# EAGLE board nervous_system (EAGLE 8.4.1), part 1 of 2
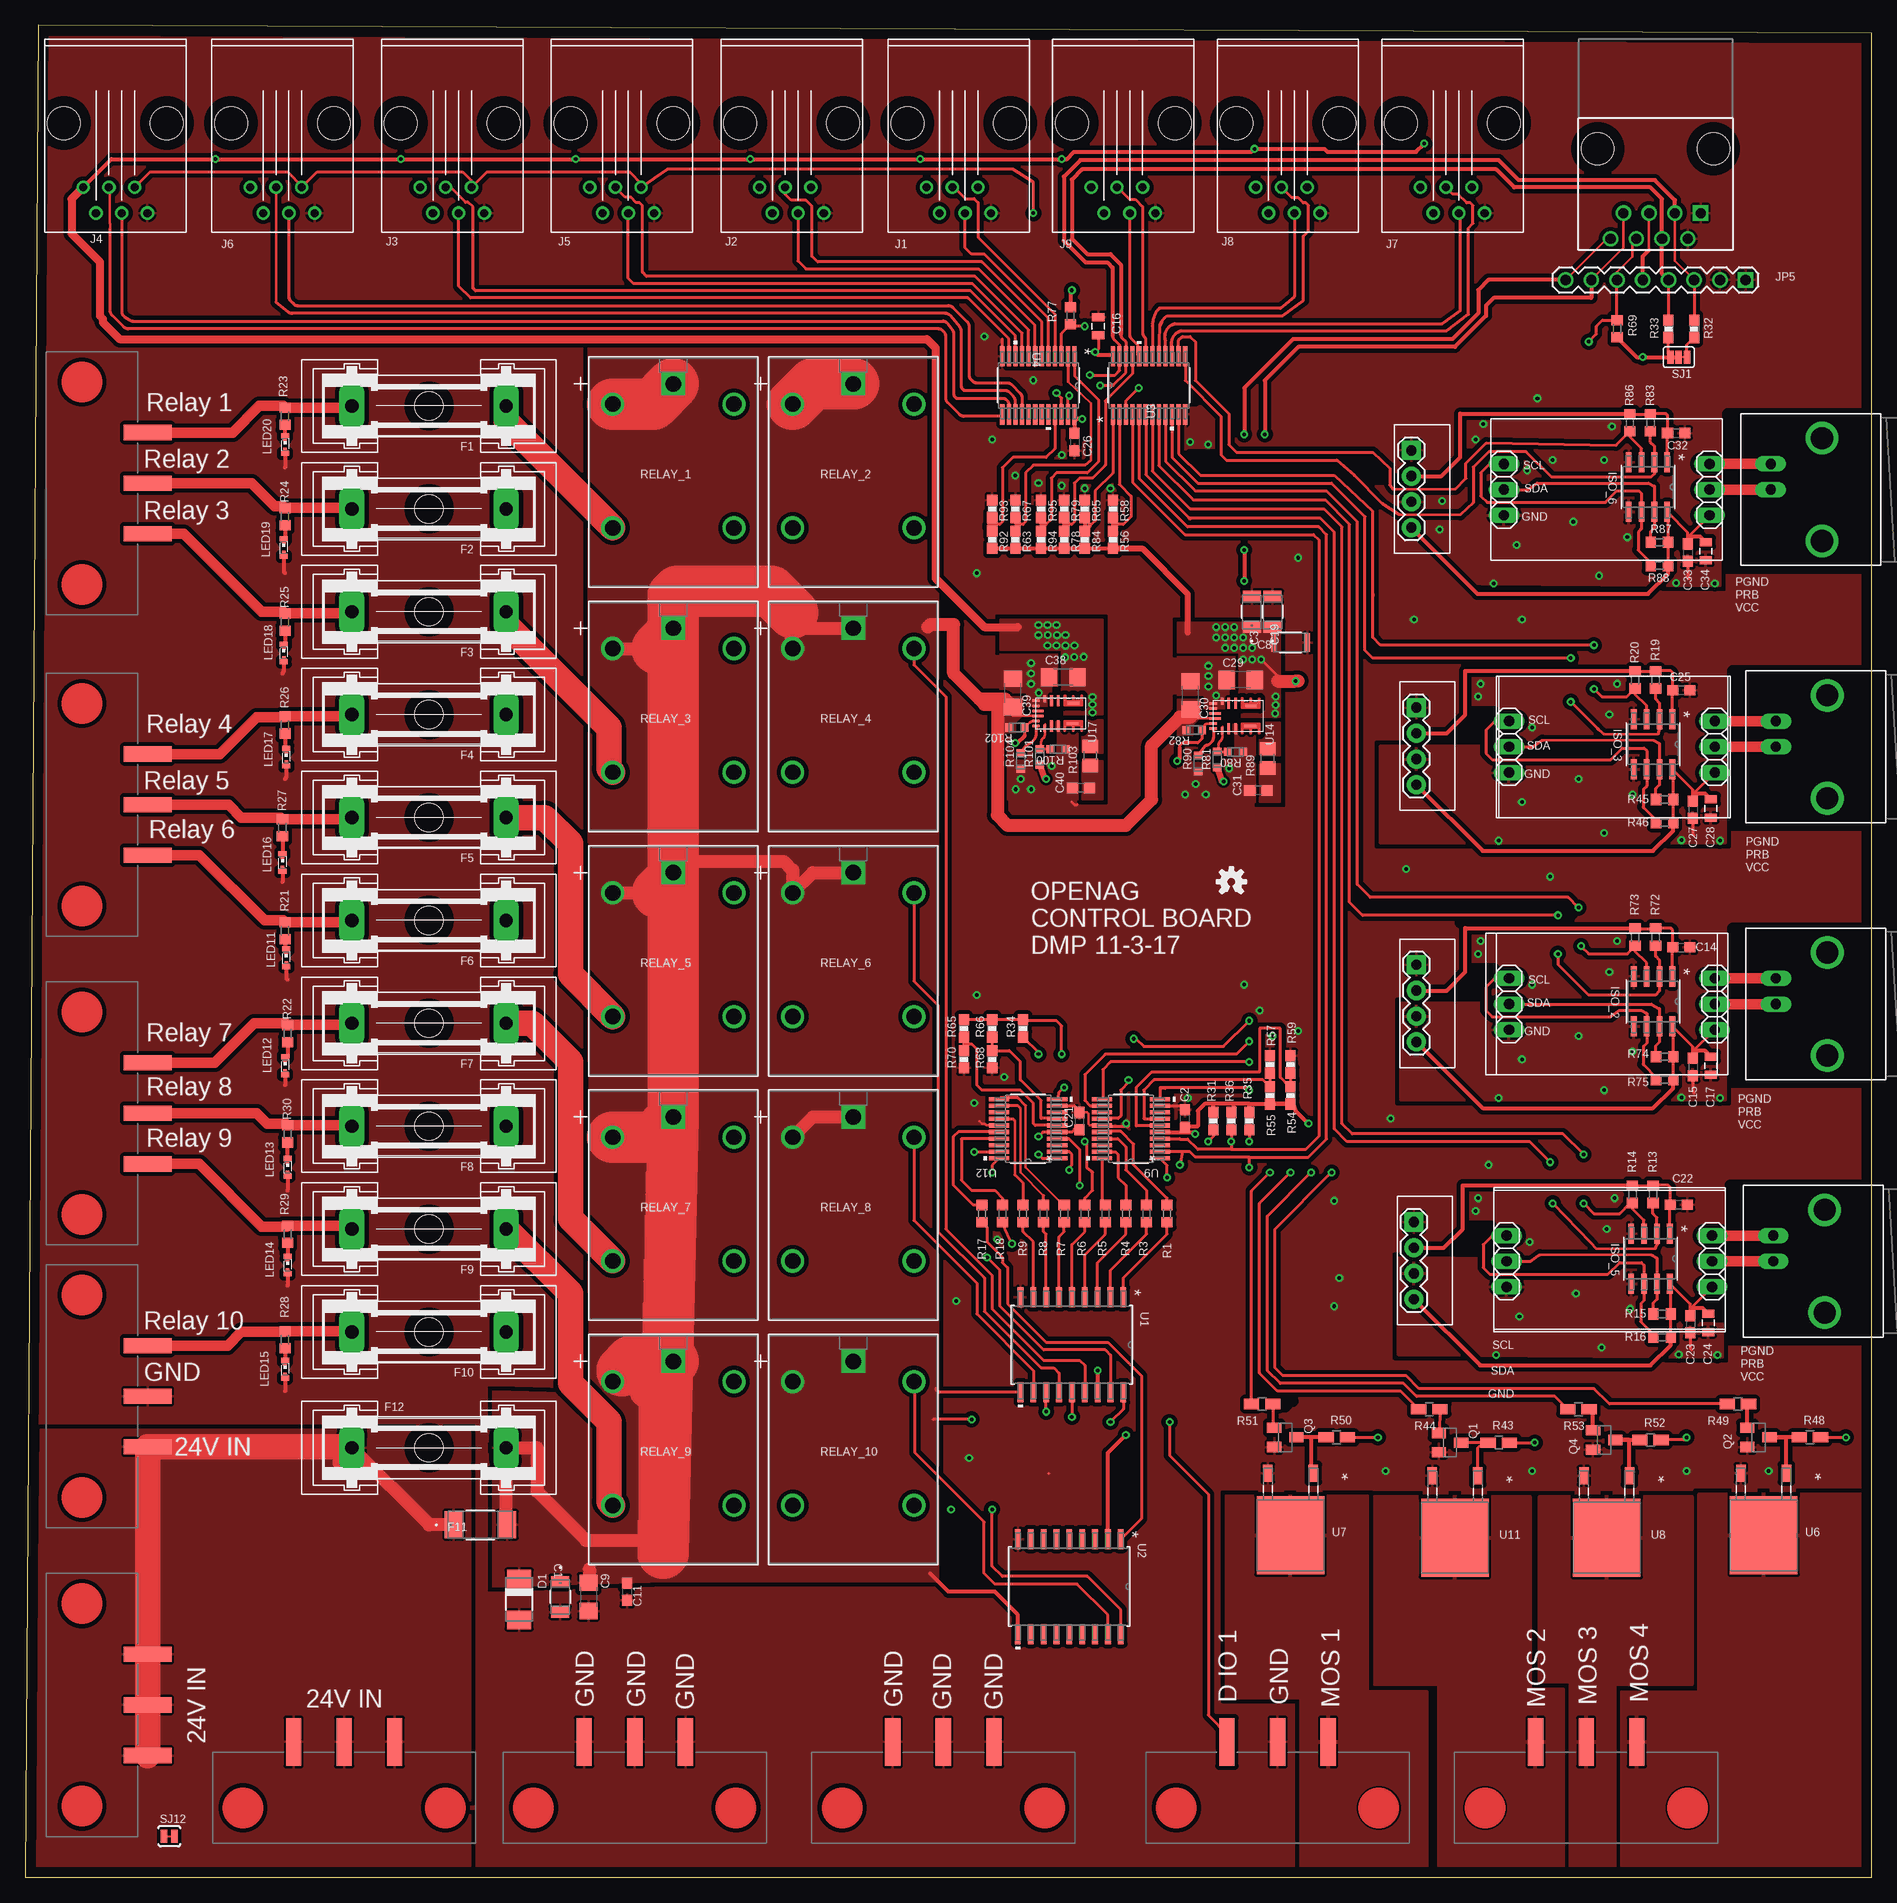
[diagram p0: board, top side]
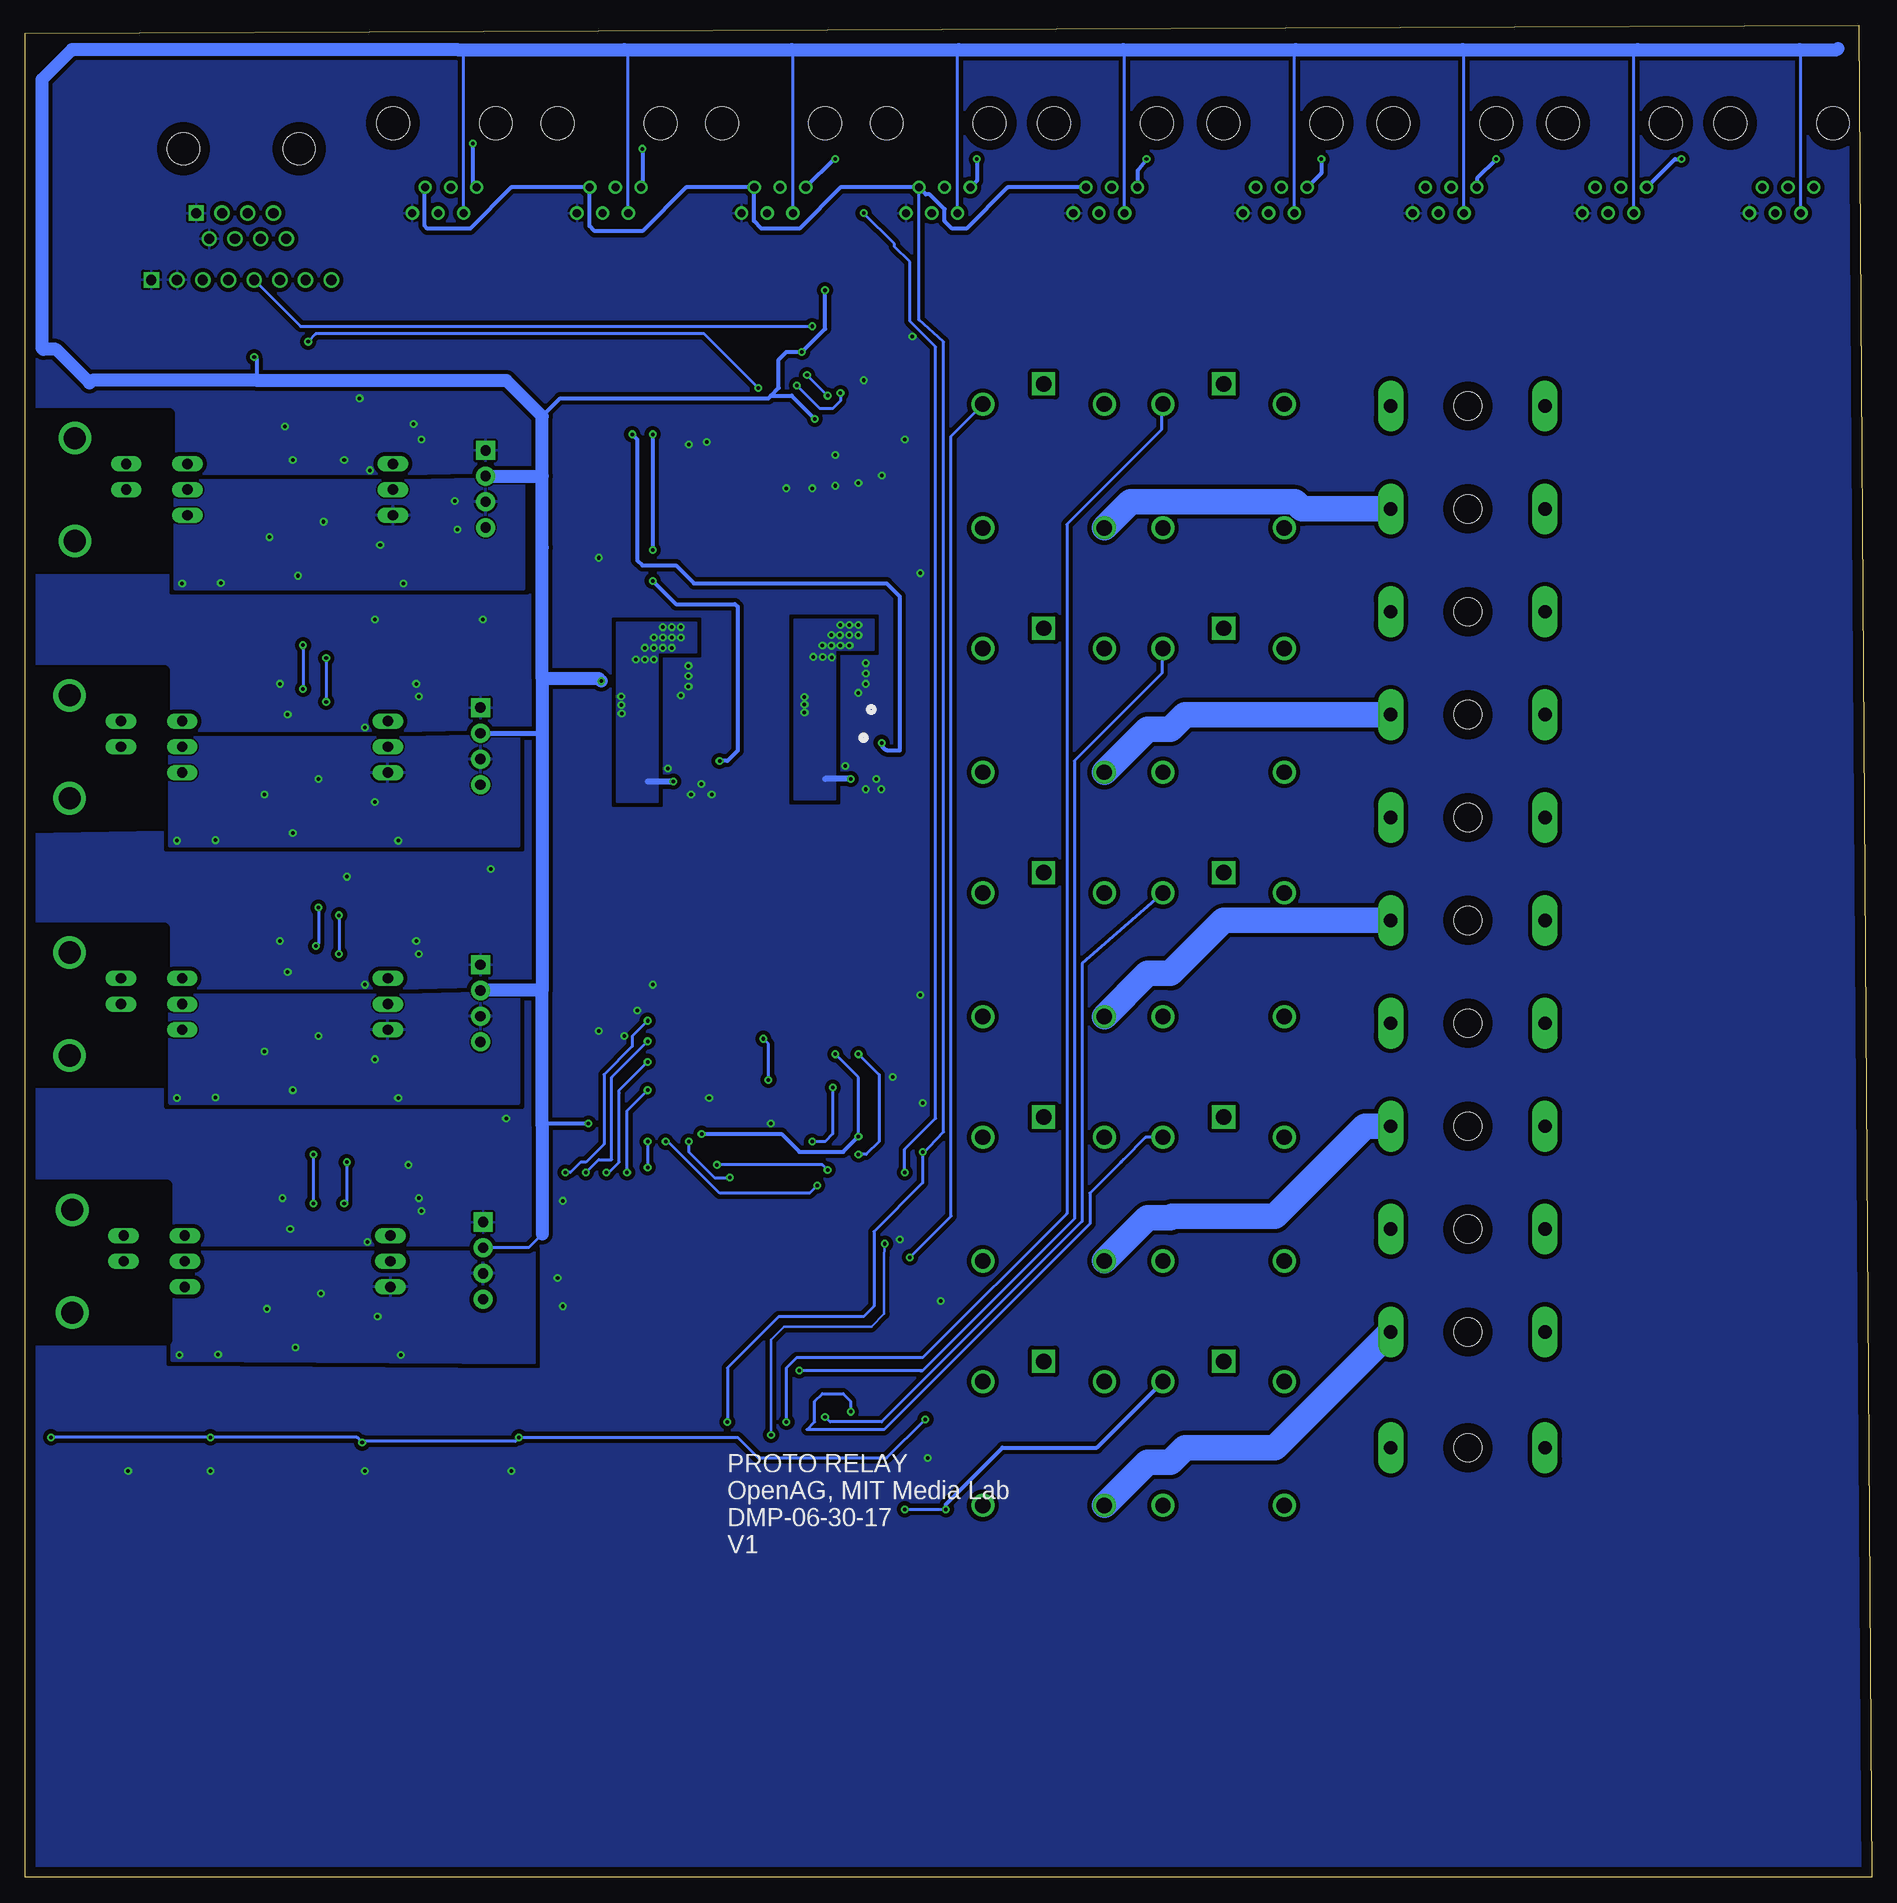
[diagram p1: board, bottom side, seen from below]

Size 182.37 x 182.88 mm. Coordinates in mm from the lower left corner, seen from the top.
Outline: 0,0 182.37,0 182.37,182.12 1.27,182.88 0,0
Copper layers (1*16): Top 0.035mm / dielectric 1.5mm / Bottom 0.035mm
Design rules "default *": minimum track width 6mil, minimum drill 0.35mm, track to track 6mil, track to pad 6mil, pad to pad 6mil, via to via 6mil, smd to smd 6mil, copper to edge 40mil, drill to drill 6mil, minimum pad ring 10mil, minimum via ring 8mil, stop-mask expansion 4mil, vias tented up to drill 20mil, thermal gap 10mil
tRestrict: 45 lines
bRestrict: 12 lines

## Footprints (pad centres in the part's own frame; a part is rotated, then mirrored left to right if it is on the bottom)
CAP_C1206 = smd 1.118 x 1.803: 1 -1.499,0; 2 1.499,0
C0603@1 = smd 1.1 x 1: 1 -0.85,0; 2 0.85,0
C1206C = smd 0.508 x 1.803: 1 -1.651,0; 2 1.651,0
C1206 = smd 1.6 x 1.8: 1 -1.4,0; 2 1.4,0
C0603 = smd 1.1 x 1: 1 -0.85,0; 2 0.85,0
0805@1 = smd 0.8 x 1.2: 1 -0.9,0; 2 0.9,0
DO-214AC = smd 1.8 x 2.4: A 2.025,0; C -2.025,0
GSH15 = drill 1.321 pad 2.54 long: 1 -7.62,0; 2 7.62,0 | hole 2.794: 0,0
SS = smd 1.803 x 2.642: 1 -2.629,0; 2 2.629,0
D8 = smd 1.981 x 0.559: 1 -2.464,1.905; 2 -2.464,0.635; 3 -2.464,-0.635; 4 -2.464,-1.905; 5 2.464,-1.905; 6 2.464,-0.635; 7 2.464,0.635; 8 2.464,1.905
RJ12 = drill 0.8: 1 -8.89,-3.175; 2 -6.35,-1.905; 3 -8.89,-0.635; 4 -6.35,0.635; 5 -8.89,1.905; 6 -6.35,3.175 | hole 3.25: 0,-5.08; 0,5.08
1X03 = drill 1.016 long: 1 -2.54,0; 2 0,0; 3 2.54,0
1X08 = drill 1.016 square: 1 0,0 | drill 1.016: 2 2.54,0; 3 5.08,0; 4 7.62,0; 5 10.16,0; 6 12.7,0; 7 15.24,0; 8 17.78,0
SMARTLED-TTW = smd 0.8 x 0.5: A 0,-0.875; C 0,0.875 | smd 0.35 x 0.35: A@1 0,-0.5; C@1 0,0.5
SOT23-BEC = smd 1 x 1.4: B -0.95,-1.1; C 0,1.1; E 0.95,-1.1
R0603 = smd 1 x 1.1: 1 -0.85,0; 2 0.85,0
0603-RES = smd 1.1 x 1: 1 -0.85,0; 2 0.85,0
R0805W = smd 1.5 x 1: 1 -1.052,0; 2 1.052,0
RC0603N = smd 0.756 x 0.8: 1 -0.778,0; 2 0.778,0
R0805 = smd 1.3 x 1.5: 1 -0.95,0; 2 0.95,0
RELAY_G5LE-1 = drill 1.524 pad 2.032 square: 1 0,17.424 | drill 1.524 pad 2.032: 2 -5.994,15.418; 3 -5.994,3.2; 4 5.994,3.2; 5 5.994,15.418
SIP4 = drill 1.016 pad 1.88 square: 1 0,0 | drill 1.016 pad 1.88: 2 2.54,0; 3 5.08,0; 4 7.62,0
PAD-JUMPER-3-3OF3_NC_BY_TRACE_YES_SILK_FULL_BOX = smd 0.635 x 1.27: 1 -0.813,0; 2 0,0; 3 0.813,0
PAD-JUMPER-2-NC_BY_TRACE_YES_SILK = smd 0.635 x 1.27: 1 -0.508,0; 2 0.508,0
DW18 = smd 1.981 x 0.559: 1 -4.686,5.08; 2 -4.686,3.81; 3 -4.686,2.54; 4 -4.686,1.27; 5 -4.686,0; 6 -4.686,-1.27; 7 -4.686,-2.54; 8 -4.686,-3.81; 9 -4.686,-5.08; 10 4.686,-5.08; 11 4.686,-3.81; 12 4.686,-2.54; 13 4.686,-1.27; 14 4.686,0; 15 4.686,1.27; 16 4.686,2.54; 17 4.686,3.81; 18 4.686,5.08
PW24-M = smd 1.981 x 0.406: 1 -2.87,3.575; 2 -2.87,2.925; 3 -2.87,2.275; 4 -2.87,1.625; 5 -2.87,0.975; 6 -2.87,0.325; 7 -2.87,-0.325; 8 -2.87,-0.975; 9 -2.87,-1.625; 10 -2.87,-2.275; 11 -2.87,-2.925; 12 -2.87,-3.575; 13 2.87,-3.575; 14 2.87,-2.925; 15 2.87,-2.275; 16 2.87,-1.625; 17 2.87,-0.975; 18 2.87,-0.325; 19 2.87,0.325; 20 2.87,0.975; 21 2.87,1.625; 22 2.87,2.275; 23 2.87,2.925; 24 2.87,3.575
RJ45-8 = drill 1 square: 1 -4.445,6.35 | drill 1: 2 -3.175,8.89; 3 -1.905,6.35; 4 -0.635,8.89; 5 0.635,6.35; 6 1.905,8.89; 7 3.175,6.35; 8 4.445,8.89 | hole 3.2: -5.715,0; 5.715,0
DPAK = smd 0.94 x 1.702: 1 -2.25,-6.109; 2 2.25,-6.109 | smd 6.655 x 7.722: 3 0,0
PW20-M = smd 1.981 x 0.406: 1 -2.87,2.925; 2 -2.87,2.275; 3 -2.87,1.625; 4 -2.87,0.975; 5 -2.87,0.325; 6 -2.87,-0.325; 7 -2.87,-0.975; 8 -2.87,-1.625; 9 -2.87,-2.275; 10 -2.87,-2.925; 11 2.87,-2.925; 12 2.87,-2.275; 13 2.87,-1.625; 14 2.87,-0.975; 15 2.87,-0.325; 16 2.87,0.325; 17 2.87,0.975; 18 2.87,1.625; 19 2.87,2.275; 20 2.87,2.925
20-POWERLFQFN-MODULE = smd 0.675 x 0.25: 1 -1.462,1.55 | smd 1.1 x 0.25: 2 -1.25,0.9; 3 -1.25,0.25; 10 1.25,0.25; 11 1.25,0.9 | smd 0.25 x 1.1: 5 -1.01,-1.2; 8 1,-1.27; 15 0.25,2.25; 16 -0.25,2.25 | smd 0.7 x 0.25: 12 1.45,1.55 | smd 0.25 x 0.7: 13 1.25,2.45; 14 0.75,2.45; 17 -0.75,2.45; 18 -1.25,2.45
BNC = drill 2.2: 3 -5.08,5.08; 4 5.08,5.08 | drill 1.016 long: GND -2.54,0; S 0,0
WECO_3POS_SMT = smd 4.7 x 1.5: P$1 6.5,5; P$2 6.5,0; P$3 6.5,-5

## Placement (x,y rotation side)
C1  4.7uF  [CAP_C1206]  52.83,27.69 270 top
C2  .1uF  [C0603@1]  114.55,74.93 90 top
C3  4.7uF  [CAP_C1206]  121.16,124.97 90 top
C8  0.1uF  [C1206C]  124.97,121.92 0 top
C9  10uF  [C1206]  55.63,27.69 270 top
C11  .1uF  [C0603@1]  59.44,28.19 270 top
C14  [C0603]  163.58,91.82 0 top
C15  [C0603]  164.72,80.01 270 top
C16  100nF  [0805@1]  105.98,153.16 90 top
C17  100nF  [0805@1]  166.5,80.14 270 top
C19  4.7uF  [CAP_C1206]  123.19,124.97 90 top
C21  .1uF  [C0603@1]  104.14,74.68 90 top
C22  [C0603]  163.32,66.42 0 top
C23  [C0603]  164.47,54.61 270 top
C24  100nF  [0805@1]  166.24,54.74 270 top
C25  [C0603]  163.58,117.22 0 top
C26  .1uF  [C0603@1]  103.63,141.73 270 top
C27  [C0603]  164.72,105.41 270 top
C28  100nF  [0805@1]  166.5,105.54 270 top
C29  22uF  [C1206]  120.04,118.24 180 top
C30  10uF  [C1206]  115.09,116.71 90 top
C31  330pF  [C0603]  121.79,107.31 180 top
C32  [C0603]  163.07,142.62 0 top
C33  [C0603]  164.21,130.81 270 top
C34  100nF  [0805@1]  165.99,130.94 270 top
C38  22uF  [C1206]  102.51,118.49 180 top
C39  10uF  [C1206]  97.56,116.97 90 top
C40  330pF  [C0603]  104.27,107.57 180 top
D1  SMAJ14A  [DO-214AC]  48.77,27.43 270 top
F1  [GSH15]  39.88,145.29 180 top
F2  [GSH15]  39.88,135.13 180 top
F3  [GSH15]  39.88,124.97 180 top
F4  [GSH15]  39.88,114.81 180 top
F5  [GSH15]  39.88,104.65 180 top
F6  [GSH15]  39.88,94.49 180 top
F7  [GSH15]  39.88,84.33 180 top
F8  [GSH15]  39.88,74.17 180 top
F9  [GSH15]  39.88,64.01 180 top
F10  [GSH15]  39.88,53.85 180 top
F11  SST 7  [SS]  44.96,34.8 0 top
F12  [GSH15]  39.88,42.42 0 top
ISO_2  ISO1540DR  [D8]  160.78,86.49 270 top
ISO_3  ISO1540DR  [D8]  160.78,111.89 270 top
ISO_5  ISO1540DR  [D8]  160.53,61.09 270 top
ISO_6  ISO1540DR  [D8]  160.27,137.29 270 top
J1  RJ12  [RJ12]  92.2,173.23 90 top
J2  RJ12  [RJ12]  75.69,173.23 90 top
J3  RJ12  [RJ12]  42.16,173.23 90 top
J4  RJ12  [RJ12]  8.89,173.23 90 top
J5  RJ12  [RJ12]  58.93,173.23 90 top
J6  RJ12  [RJ12]  25.4,173.23 90 top
J7  RJ12  [RJ12]  140.97,173.23 90 top
J8  RJ12  [RJ12]  124.71,173.23 90 top
J9  RJ12  [RJ12]  108.46,173.23 90 top
JP1  [1X03]  146.56,86.23 90 top
JP2  [1X03]  166.88,86.23 90 top
JP5  [1X08]  169.93,157.73 180 top
JP6  [1X03]  146.3,60.83 90 top
JP7  [1X03]  166.62,60.83 90 top
JP8  [1X03]  146.56,111.63 90 top
JP9  [1X03]  166.88,111.63 90 top
JP12  [1X03]  146.05,137.03 90 top
JP13  [1X03]  166.37,137.03 90 top
LED11  [SMARTLED-TTW]  25.78,90.81 180 top
LED12  [SMARTLED-TTW]  25.65,80.14 180 top
LED13  [SMARTLED-TTW]  25.91,70.1 180 top
LED14  [SMARTLED-TTW]  25.91,60.45 180 top
LED15  [SMARTLED-TTW]  25.65,50.16 180 top
LED16  [SMARTLED-TTW]  25.4,100.2 180 top
LED17  [SMARTLED-TTW]  25.78,110.62 180 top
LED18  [SMARTLED-TTW]  25.53,120.9 180 top
LED19  [SMARTLED-TTW]  25.53,131.32 180 top
LED20  [SMARTLED-TTW]  25.65,141.48 180 top
LOGO3  OSHW-LOGOS  [OSHW-LOGO-S]  119.13,98.3 0 top
Q1  MMBT2222A  [SOT23-BEC]  140.72,42.93 270 top
Q2  MMBT2222A  [SOT23-BEC]  171.2,43.43 270 top
Q3  MMBT2222A  [SOT23-BEC]  124.46,43.43 270 top
Q4  MMBT2222A  [SOT23-BEC]  155.96,43.18 270 top
R1  0 ohm  [R0603]  112.78,65.53 270 top
R3  0 ohm  [R0603]  110.74,65.53 90 top
R4  0 ohm  [R0603]  108.71,65.53 90 top
R5  0 ohm  [R0603]  106.68,65.53 90 top
R6  0 ohm  [R0603]  104.65,65.53 90 top
R7  0 ohm  [R0603]  102.62,65.53 90 top
R8  0 ohm  [R0603]  100.58,65.53 90 top
R9  0 ohm  [R0603]  98.55,65.53 90 top
R13  [R0603]  160.78,67.44 90 top
R14  [R0603]  158.75,67.44 90 top
R15  [R0603]  161.67,55.63 0 top
R16  [R0603]  161.67,53.34 0 top
R17  0 ohm  [R0603]  94.49,65.53 270 top
R18  0 ohm  [R0603]  96.52,65.53 270 top
R19  [R0603]  161.04,118.24 90 top
R20  [R0603]  159,118.24 90 top
R21  10K  [R0603]  25.65,93.47 90 top
R22  10K  [R0603]  25.91,83.31 90 top
R23  10K  [R0603]  25.65,144.27 90 top
R24  10K  [R0603]  25.65,134.37 90 top
R25  10K  [R0603]  25.65,123.95 90 top
R26  10K  [R0603]  25.65,113.79 90 top
R27  10K  [R0603]  25.4,103.63 90 top
R28  10K  [R0603]  25.65,53.09 90 top
R29  10K  [R0603]  25.91,63.5 90 top
R30  10K  [R0603]  25.91,73.41 90 top
R31  10K  [0603-RES]  117.35,74.68 90 top
R32  10K  [0603-RES]  164.85,152.91 270 top
R33  10K  [0603-RES]  162.31,152.91 270 top
R34  10K  [0603-RES]  98.55,83.82 90 top
R35  10K  [0603-RES]  120.9,74.68 90 top
R36  10K  [0603-RES]  119.13,74.68 90 top
R43  [R0805W]  145.54,42.93 0 top
R44  [R0805W]  138.68,46.23 180 top
R45  [R0603]  161.93,106.43 0 top
R46  [R0603]  161.93,104.14 0 top
R48  [R0805W]  176.28,43.43 0 top
R49  [R0805W]  169.16,46.74 180 top
R50  [R0805W]  129.54,43.43 0 top
R51  [R0805W]  122.17,46.74 180 top
R52  [R0805W]  160.53,43.18 0 top
R53  [R0805W]  153.42,46.23 180 top
R54  10K  [0603-RES]  124.97,77.22 270 top
R55  10K  [0603-RES]  122.94,77.22 270 top
R56  10K  [0603-RES]  107.44,132.08 270 top
R57  10K  [0603-RES]  122.94,80.26 270 top
R58  10K  [0603-RES]  107.44,135.13 270 top
R59  10K  [0603-RES]  124.97,80.26 270 top
R63  10K  [0603-RES]  97.79,132.08 270 top
R65  10K  [0603-RES]  92.71,83.82 90 top
R66  10K  [0603-RES]  95.5,83.82 90 top
R67  10K  [0603-RES]  97.79,135.13 270 top
R68  10K  [0603-RES]  95.5,80.77 90 top
R69  0 ohm  [R0603]  157.23,152.91 270 top
R70  10K  [0603-RES]  92.71,80.77 90 top
R72  [R0603]  161.04,92.84 90 top
R73  [R0603]  159,92.84 90 top
R74  [R0603]  161.93,81.03 0 top
R75  [R0603]  161.93,78.74 0 top
R77  0 ohm  [R0603]  103.25,154.2 90 top
R78  10K  [0603-RES]  102.62,132.08 270 top
R79  10K  [0603-RES]  102.62,135.13 270 top
R80  51K  [RC0603N]  119.53,111.12 180 top
R81  160K  [RC0603N]  117.73,110.39 270 top
R82  200K  [RC0603N]  115.47,113.28 180 top
R83  [R0603]  160.53,143.64 90 top
R84  10K  [0603-RES]  104.65,132.08 270 top
R85  10K  [0603-RES]  104.65,135.13 270 top
R86  [R0603]  158.5,143.64 90 top
R87  [R0603]  161.42,131.83 0 top
R88  [R0603]  161.42,129.54 0 top
R89  6.34 ohm  [R0805]  122.71,110.49 90 top
R90  16.5K  [RC0603N]  115.85,109.98 90 top
R92  10K  [0603-RES]  95.5,132.08 270 top
R93  10K  [0603-RES]  95.5,135.13 270 top
R94  10K  [0603-RES]  100.33,132.08 270 top
R95  10K  [0603-RES]  100.33,135.13 270 top
R100  30.1K  [RC0603N]  102.01,111.38 180 top
R101  160K  [RC0603N]  100.2,110.64 270 top
R102  200K  [RC0603N]  97.94,113.54 180 top
R103  6.34 ohm  [R0805]  105.18,110.74 90 top
R104  16.5K  [RC0603N]  98.32,110.24 90 top
RELAY_1  G5LE-14_DC12  [RELAY_G5LE-1]  64.01,130.05 0 top
RELAY_2  G5LE-14_DC12  [RELAY_G5LE-1]  81.79,130.05 0 top
RELAY_3  G5LE-14_DC12  [RELAY_G5LE-1]  64.01,105.92 0 top
RELAY_4  G5LE-14_DC12  [RELAY_G5LE-1]  81.79,105.92 0 top
RELAY_5  G5LE-14_DC12  [RELAY_G5LE-1]  64.01,81.79 0 top
RELAY_6  G5LE-14_DC12  [RELAY_G5LE-1]  81.79,81.79 0 top
RELAY_7  G5LE-14_DC12  [RELAY_G5LE-1]  64.01,57.66 0 top
RELAY_8  G5LE-14_DC12  [RELAY_G5LE-1]  81.79,57.66 0 top
RELAY_9  G5LE-14_DC12  [RELAY_G5LE-1]  64.01,33.53 0 top
RELAY_10  G5LE-14_DC12  [RELAY_G5LE-1]  81.79,33.53 0 top
RM3.33.3S1  ROE-0505S  [SIP4]  137.41,90.11 270 top
RM3.33.3S3  ROE-0505S  [SIP4]  137.16,64.71 270 top
RM3.33.3S4  ROE-0505S  [SIP4]  137.41,115.51 270 top
RM3.33.3S6  ROE-0505S  [SIP4]  136.91,140.91 270 top
SJ1  [PAD-JUMPER-3-3OF3_NC_BY_TRACE_YES_SILK_FULL_BOX]  163.32,150.11 180 top
SJ12  VCC2-3.3V  [PAD-JUMPER-2-NC_BY_TRACE_YES_SILK]  14.22,4.06 0 top
U1  ULN2803ADWR  [DW18]  103.38,52.58 270 top
U2  ULN2803ADWR  [DW18]  103.12,28.7 270 top
U3  TCA9548APWRPW24-M  [PW24-M]  111,147.32 90 top
U4  TCA9548APWRPW24-M  [PW24-M]  100.08,147.32 270 top
U5  RJ45  [RJ45-8]  161.04,170.69 180 top
U6  STD12NF06LT4  [DPAK]  171.7,33.78 180 top
U7  STD12NF06LT4  [DPAK]  124.97,33.78 180 top
U8  STD12NF06LT4  [DPAK]  156.21,33.53 180 top
U9  PCF8574APWRPW20-M  [PW20-M]  109.22,73.91 180 top
U11  STD12NF06LT4  [DPAK]  141.22,33.53 180 top
U12  PCF8574APWRPW20-M  [PW20-M]  99.06,73.91 180 top
U14  MPM3620GQV-P  [20-POWERLFQFN-MODULE]  119.79,114.68 90 top
U17  MPM3620GQV-P  [20-POWERLFQFN-MODULE]  102.26,114.94 90 top
U$2  BNCPTH  [BNC]  172.66,60.83 270 top
U$3  BNCPTH  [BNC]  172.91,111.63 270 top
U$5  BNCPTH  [BNC]  172.4,137.03 270 top
U$33  BNCPTH  [BNC]  172.91,86.23 270 top
X1  MSTBA3WECO_SMT  [WECO_3POS_SMT]  5.59,137.67 0 top
X2  MSTBA3WECO_SMT  [WECO_3POS_SMT]  5.59,105.92 0 top
X3  MSTBA3WECO_SMT  [WECO_3POS_SMT]  5.59,75.44 0 top
X4  MSTBA3WECO_SMT  [WECO_3POS_SMT]  5.59,47.5 0 top
X5  MSTBA3WECO_SMT  [WECO_3POS_SMT]  31.5,6.86 90 top
X6  MSTBA3WECO_SMT  [WECO_3POS_SMT]  5.59,17.02 0 top
X7  MSTBA3WECO_SMT  [WECO_3POS_SMT]  60.2,6.86 90 top
X8  MSTBA3WECO_SMT  [WECO_3POS_SMT]  90.68,6.86 90 top
X9  MSTBA3WECO_SMT  [WECO_3POS_SMT]  154.18,6.86 90 top
X10  MSTBA3WECO_SMT  [WECO_3POS_SMT]  123.7,6.86 90 top

## Library data of the parts
C1 C3 C8 C9 C19 C29-C31 C38-C40 = openag-capacitors; POPULATE: YES; VERIFIED: NO
C2 C11 C14 C15 C21-C23 C25-C27 C32 C33 R1 R3-R9 R13-R30 R43-R46 R48-R53 R69 R72-R75 R77 R83 R86-R88 = rcl
C16 C17 C24 C28 C34 = SparkFun-Capacitors
D1 = openag-diodes; POPULATE: YES; VERIFIED: NO
F1-F10 F12 = fuse; MPN: 64900001039; OC_FARNELL: 1271673; OC_NEWARK: 02P0318
F11 = openag-fuses; POPULATE: YES; VERIFIED: NO
ISO_2 ISO_3 ISO_5 ISO_6 = ISO1540; MANUFACTURER_PART_NUMBER: ISO1540DR; VENDOR: Texas Instruments
J1-J9 = con-rj
JP1 JP2 JP6-JP9 JP12 JP13 = pinhead
JP5 U5 = SparkFun
LED11-LED20 = led
LOGO3 = SparkFun-Aesthetics
Q1-Q4 = transistor-npn
R31-R36 R54-R59 R63 R65-R68 R70 R78 R79 R84 R85 R92-R95 = SparkFun-Resistors; PROD_ID: RES-00824
R80 R81 R89 R90 R100 R101 R103 R104 = openag-resistors; POPULATE: YES; VERIFIED: NO
R82 R102 = openag-resistors; POPULATE: NO; VERIFIED: NO
RELAY_1-RELAY_10 = relay_2; MANUFACTURER_PART_NUMBER: G5LE14 DC12; VENDOR: OMRON
RM3.33.3S1 RM3.33.3S3 RM3.33.3S4 RM3.33.3S6 U$2 U$3 U$5 U$33 = mranostay
SJ1 SJ12 = SparkFun-Passives
U1 U2 = ULN2803; MANUFACTURER_PART_NUMBER: ULN2803ADWR; VENDOR: Vendor
U3 U4 = OpenAG_I2C; MANUFACTURER_PART_NUMBER: TCA9548APWR; VENDOR: TEXAS INSTRUMENTS
U6-U8 U11 = OpenAG_I2C; MANUFACTURER_PART_NUMBER: STD12NF06LT4; VENDOR: ST Microelectronics
U9 U12 = IO_Expander; MANUFACTURER_PART_NUMBER: PCF8574APWR; VENDOR: Texas Instruments
U14 U17 = openag-regulators; POPULATE: YES; VERIFIED: NO
X1-X10 = Poitrast_LEDdynamics

## Nets
1C: RELAY_1.5 U1.18
2C: RELAY_2.5 U1.17
3C: RELAY_3.5 U1.16
4C: RELAY_4.5 U1.15
5C: RELAY_5.5 U1.14
6C: RELAY_6.5 U1.13
7C: RELAY_7.5 U1.12
8C: RELAY_8.5 U1.11
9C: RELAY_9.5 U2.18
10C: RELAY_10.5 U2.17
24V_IN: F11.1 F12.1 X4.P$3 X5.P$1 X5.P$2 X5.P$3 X6.P$1 X6.P$2 X6.P$3
+3V3: C2.1 C3.1 C8.1 C14.1 C16.1 C19.1 C21.1 C22.1 C25.1 C26.1 C29.1 C32.1 ISO_2.1 ISO_3.1 ISO_5.1 ISO_6.1 J1.5 J2.5 J3.5 J4.5 J5.5 J6.5 J7.5 J8.5 J9.5 R13.2 R14.2 R19.2 R20.2 R31.2 R34.2 R35.2 R36.2 R54.2 R55.2 R56.2 R63.2 R65.2 R66.2 R69.2 R72.2 R73.2 R77.2 R78.2 R81.2 R83.2 R84.2 R86.2 R92.2 R94.2 RM3.33.3S1.2 RM3.33.3S3.2 RM3.33.3S4.2 RM3.33.3S6.2 SJ1.2 U3.24 U4.24 U9.5 U12.5 U14.8
+5V: C38.1 J1.6 J2.6 J3.6 J4.6 J5.6 J6.6 J7.6 J8.6 J9.6 R101.2 U17.8
+24V: C1.1 C9.1 C11.1 C30.1 C39.1 D1.C F11.2 F12.2 R43.2 R48.2 R50.2 R52.2 R82.2 R102.2 RELAY_1.1 RELAY_1.2 RELAY_2.1 RELAY_2.2 RELAY_3.1 RELAY_3.2 RELAY_4.1 RELAY_4.2 RELAY_5.1 RELAY_5.2 RELAY_6.1 RELAY_6.2 RELAY_7.1 RELAY_7.2 RELAY_8.1 RELAY_8.2 RELAY_9.1 RELAY_9.2 RELAY_10.1 RELAY_10.2 U1.10 U2.10 U14.16 U17.16
A0_EXT_1: R94.1 R95.2 U4.1
A0_EXT_2: R84.1 R85.2 U3.1
A0_IO: R54.1 R59.2 U9.6
A0_IO_2: R65.1 R70.2 U12.6
A1_EXT_1: R63.1 R67.2 U4.2
A1_EXT_2: R56.1 R58.2 U3.2
A1_IO: R55.1 R57.2 U9.7
A1_IO_2: R66.1 R68.2 U12.7
A2_EXT_1: R92.1 R93.2 U4.21
A2_EXT_2: R78.1 R79.2 U3.21
GND: C1.2 C2.2 C3.2 C8.2 C9.2 C11.2 C14.2 C16.2 C19.2 C21.2 C22.2 C25.2 C26.2 C29.2 C30.2 C31.2 C32.2 C38.2 C39.2 C40.2 D1.A ISO_2.4 ISO_3.4 ISO_5.4 ISO_6.4 J1.1 J2.1 J3.1 J4.1 J5.1 J6.1 J7.1 J8.1 J9.1 JP5.1 JP5.2 LED11.C@1 LED12.C@1 LED13.C@1 LED14.C@1 LED15.C@1 LED16.C@1 LED17.C@1 LED18.C@1 LED19.C@1 LED20.C@1 Q1.E Q2.E Q3.E Q4.E R57.1 R58.1 R59.1 R67.1 R68.1 R70.1 R79.1 R80.1 R85.1 R90.1 R93.1 R95.1 R100.1 R104.1 RM3.33.3S1.1 RM3.33.3S3.1 RM3.33.3S4.1 RM3.33.3S6.1 U1.9 U2.9 U3.12 U4.12 U5.1 U5.2 U6.2 U7.2 U8.2 U9.9 U9.15 U11.2 U12.9 U12.15 U14.3 U14.12 U14.13 U14.14 U17.3 U17.12 U17.13 U17.14 X4.P$2 X7.P$1 X7.P$2 X7.P$3 X8.P$1 X8.P$2 X8.P$3 X10.P$2
HTAB: U2.8
HTAB_4: U2.3
HTAB_5: U2.4
HTAB_6: U2.5
HTAB_7: U2.6
HTAB_8: U2.7
I1SCL: ISO_5.6 JP6.3 R16.1
I1SDA: ISO_5.7 JP6.2 R15.1
I2SCL: ISO_2.6 JP1.3 R75.1
I2SDA: ISO_2.7 JP1.2 R74.1
I3SCL: ISO_3.6 JP8.3 R46.1
I3SDA: ISO_3.7 JP8.2 R45.1
I4SCL: ISO_6.6 JP12.3 R88.1
I4SDA: ISO_6.7 JP12.2 R87.1
ISO_3V3_1: C23.1 C24.1 ISO_5.8 JP7.1 R15.2 R16.2 RM3.33.3S3.4
ISO_3V3_2: C15.1 C17.1 ISO_2.8 JP2.1 R74.2 R75.2 RM3.33.3S1.4
ISO_3V3_3: C27.1 C28.1 ISO_3.8 JP9.1 R45.2 R46.2 RM3.33.3S4.4
ISO_3V3_4: C33.1 C34.1 ISO_6.8 JP13.1 R87.2 R88.2 RM3.33.3S6.4
ISO_GND_1: C23.2 C24.2 ISO_5.5 JP6.1 RM3.33.3S3.3
ISO_GND_2: C15.2 C17.2 ISO_2.5 JP1.1 RM3.33.3S1.3
ISO_GND_3: C27.2 C28.2 ISO_3.5 JP8.1 RM3.33.3S4.3
ISO_GND_4: C33.2 C34.2 ISO_6.5 JP12.1 RM3.33.3S6.3
MOS1: U7.3 X10.P$3
MOS2: U11.3 X9.P$1
MOS3: U8.3 X9.P$2
MOS4: U6.3 X9.P$3
N$1: R1.2 U1.1
N$3: R3.1 U1.2
N$4: R4.1 U1.3
N$5: R5.1 U1.4
N$6: R6.1 U1.5
N$7: R7.1 U1.6
N$8: R8.1 U1.7
N$9: R9.1 U1.8
N$10: F10.1 RELAY_10.3
N$11: F9.1 RELAY_9.3
N$13: F8.1 RELAY_8.3
N$15: F7.1 RELAY_7.3
N$16: R80.2 R81.1 U14.1
N$19: R89.2 U14.5
N$20: C31.1 R89.1
N$21: R90.2 U14.18
N$25: F6.1 RELAY_6.3
N$27: F1.1 RELAY_1.3
N$29: F2.1 RELAY_2.3
N$31: F3.1 RELAY_3.3
N$33: F4.1 RELAY_4.3
N$34: R100.2 R101.1 U17.1
N$35: F5.1 RELAY_5.3
N$36: R103.2 U17.5
N$37: Q1.C R43.1 U11.1
N$38: Q1.B R44.1
N$39: C40.1 R103.1
N$40: R104.2 U17.18
N$41: Q2.C R48.1 U6.1
N$42: Q2.B R49.1
N$45: Q3.C R50.1 U7.1
N$46: Q3.B R51.1
N$47: R17.2 U2.1
N$48: R18.2 U2.2
N$49: R34.1 U12.1
N$53: LED11.A@1 R21.1
N$54: LED12.A@1 R22.1
N$55: LED16.A@1 R27.1
N$56: LED17.A@1 R26.1
N$57: LED18.A@1 R25.1
N$58: LED20.A@1 R23.1
N$59: LED19.A@1 R24.1
N$60: LED13.A@1 R30.1
N$61: LED14.A@1 R29.1
N$62: LED15.A@1 R28.1
N$63: Q4.C R52.1 U8.1
N$64: Q4.B R53.1
N$65: R31.1 U9.1
N$66: R33.2 SJ1.3
N$67: R32.2 SJ1.1
P0_IO: R51.2 U9.10
P1_IO: R44.2 U9.11
P2_IO: R53.2 U9.12
P3_IO: R49.2 U9.14
P4_IO: R1.1 U9.16
P5_IO: R3.2 U9.17
P6_IO: R4.2 U9.19
P7_IO: R5.2 U9.20
P8_IO: R6.2 U12.10
P9_IO: R7.2 U12.11
P10_IO: R8.2 U12.12
P11_IO: R9.2 U12.14
P12_IO: R17.1 U12.16
P13_IO: R18.1 U12.17
P14_IO: J1.2 J2.2 J7.2 J8.2 J9.2 U12.19 X10.P$1
P15_IO: J3.2 J4.2 J5.2 J6.2 U12.20
PBR_1: JP7.2 U$2.S
PBR_2: JP2.2 U$33.S
PBR_3: JP9.2 U$3.S
PBR_4: JP13.2 U$5.S
PGND_1: JP7.3 U$2.GND
PGND_2: JP2.3 U$33.GND
PGND_3: JP9.3 U$3.GND
PGND_4: JP13.3 U$5.GND
PWR_EN_1: JP5.7 R102.1 U5.7 U17.17
PWR_EN_2: JP5.8 R82.1 U5.8 U14.17
R1: F1.2 R23.2 X1.P$1
R2: F2.2 R24.2 X1.P$2
R3: F3.2 R25.2 X1.P$3
R4: F4.2 R26.2 X2.P$1
R5: F5.2 R27.2 X2.P$2
R6: F6.2 R21.2 X2.P$3
R7: F7.2 R22.2 X3.P$1
R8: F8.2 R30.2 X3.P$2
R9: F9.2 R29.2 X3.P$3
R10: F10.2 R28.2 X4.P$1
RESET_1: JP5.5 R77.1 U4.3 U5.5
RESET_2: JP5.6 R69.1 U3.3 U5.6
SC0: R35.1 U3.5 U9.2 U12.2
SC1: ISO_5.3 R14.1 U3.7
SC2: ISO_2.3 R73.1 U3.9
SC3: ISO_3.3 R20.1 U3.11
SC4: ISO_6.3 R86.1 U3.14
SC5: J7.3 U3.16
SC6: J8.3 U3.18
SC7: J9.3 U3.20
SC8: J1.3 U4.5
SC9: J2.3 U4.7
SC10: J5.3 U4.9
SC11: J3.3 U4.11
SC12: J4.3 U4.14
SC13: J6.3 U4.16
SCL: JP5.4 R33.1 U3.22 U4.22 U5.4
SD0: R36.1 U3.4 U9.4 U12.4
SD1: ISO_5.2 R13.1 U3.6
SD2: ISO_2.2 R72.1 U3.8
SD3: ISO_3.2 R19.1 U3.10
SD4: ISO_6.2 R83.1 U3.13
SD5: J7.4 U3.15
SD6: J8.4 U3.17
SD7: J9.4 U3.19
SD8: J1.4 U4.4
SD9: J2.4 U4.6
SD10: J5.4 U4.8
SD11: J3.4 U4.10
SD12: J4.4 U4.13
SD13: J6.4 U4.15
SDA: JP5.3 R32.1 U3.23 U4.23 U5.3